# Altium PCB VeggieIrrigation.PcbDoc
Units mm, origin at the board's own origin, x right, y up, seen from the top; angles counter-clockwise.
Board outline 80.47 x 85.32 mm, 2 copper layers (Top Layer, Bottom Layer); 29 components, 21 nets, 89 pads, 0 vias.
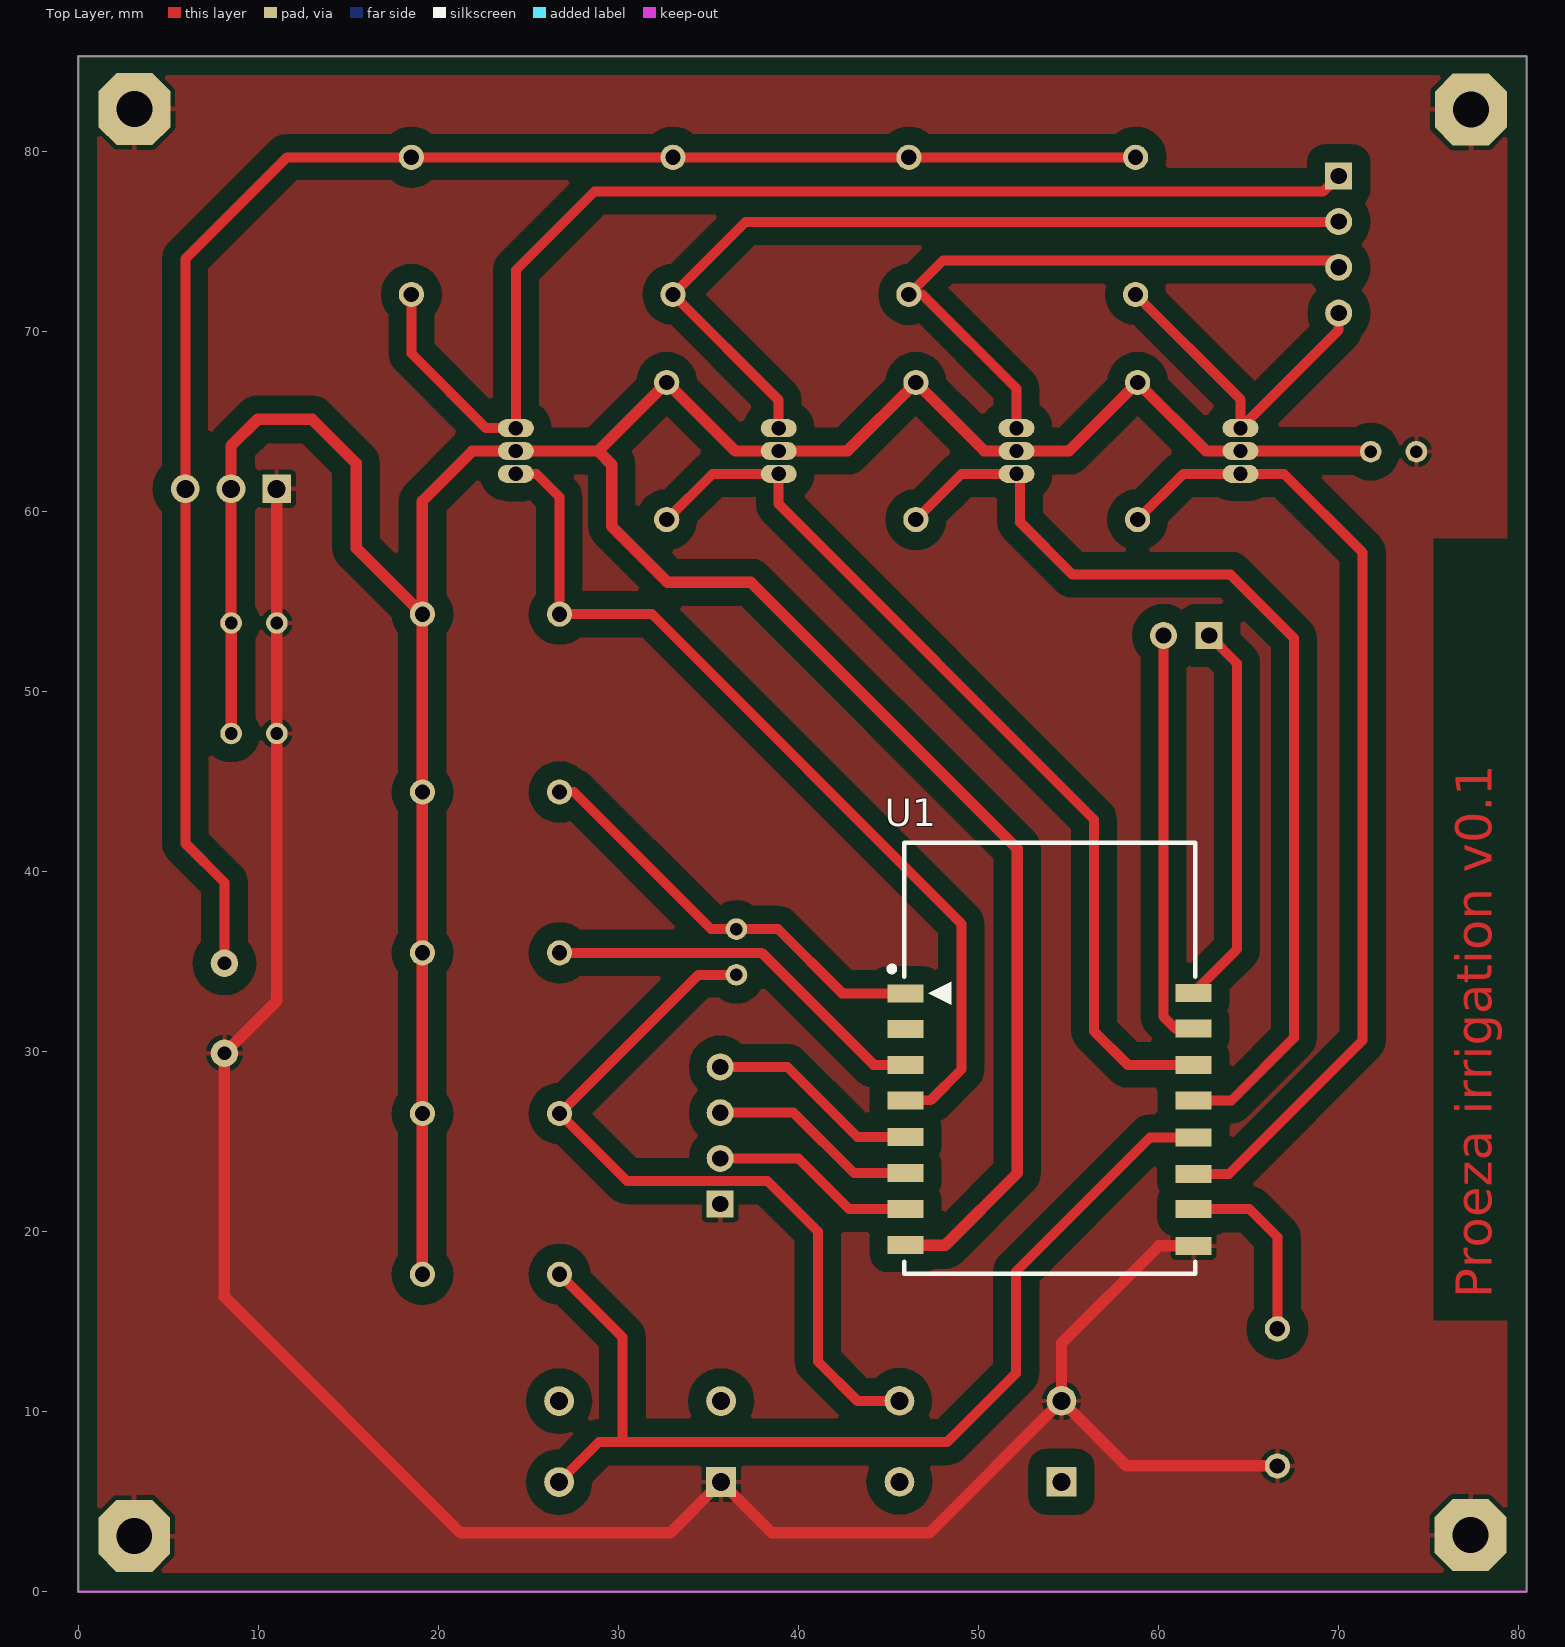
[diagram p0: Top Layer view]
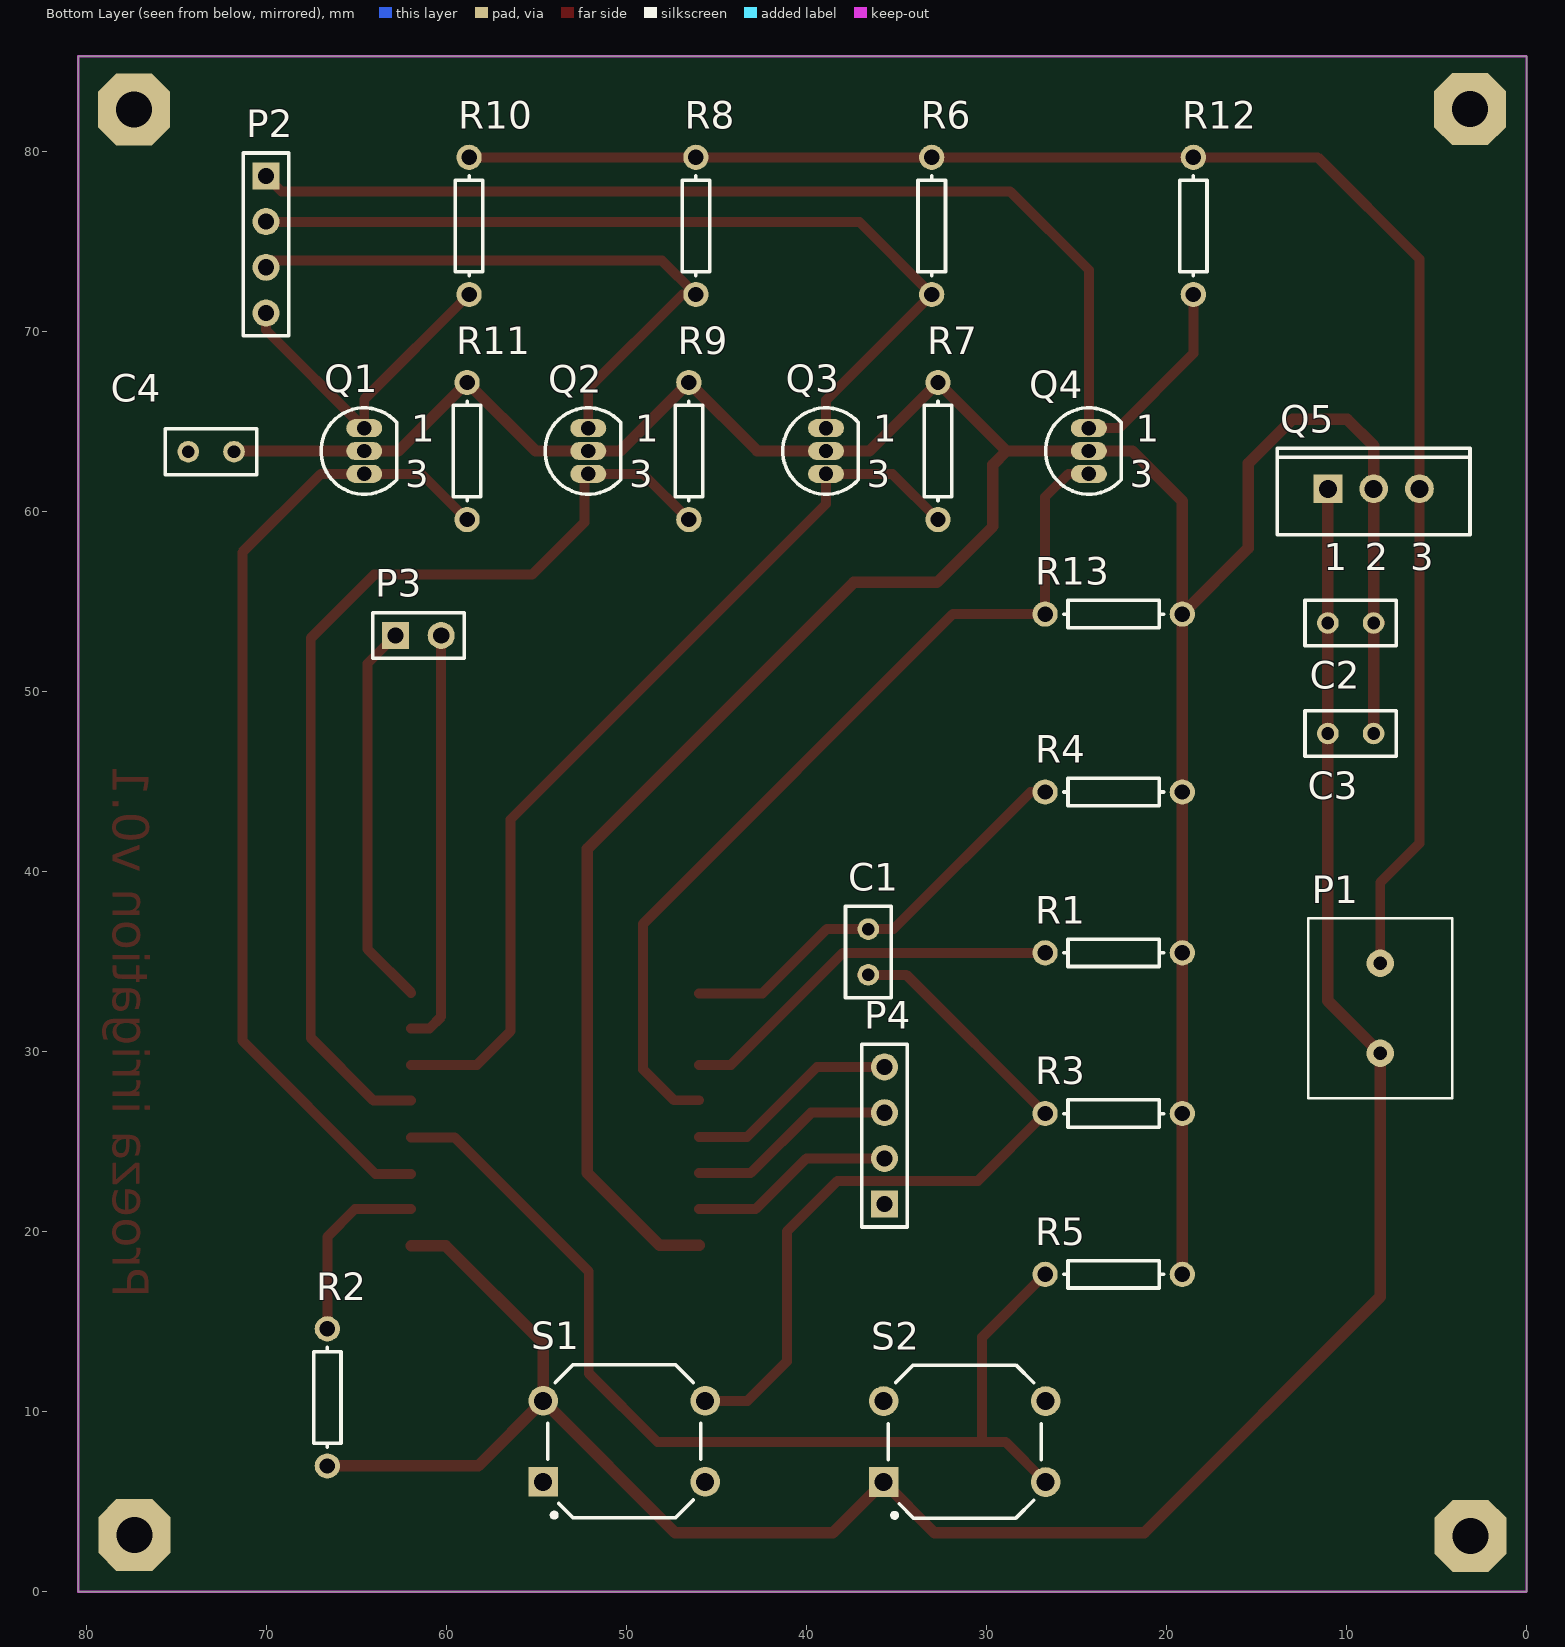
[diagram p1: Bottom Layer view, seen from below]

## Layer stack, top to bottom
Top Solder: solder mask 0.0102, Solder Resist, Dk 3.5
Top Layer: signal copper 0.0356
Dielectric 1: dielectric 0.32, FR-4, Dk 4.8
Bottom Layer: signal copper 0.0356
Bottom Solder: solder mask 0.0102, Solder Resist, Dk 3.5

## Board outline
0,0 80.469,0 80.469,85.319 0,85.319

## Design rules (kind name [scope] priority, off if disabled: settings)
Clearance "Polygon Pour Clearence" [InPolygon] p1: gap=1 ignorepadtopadclearanceinfootprint=FALSE
PolygonConnect [All] p1: connectstyle=Relief reliefconductorwidth=0.254 reliefentries=4 polygonreliefangle="90 Angle" airgapwidth=0.254
RoutingLayers [All] p1: top layer_v5=TRUE bottom layer_v5=FALSE
RoutingVias [All] p1: holewidth=0.711 width=1.27 viastyle="Through Hole" minholewidth=0.711 minwidth=1.27 maxholewidth=0.711 maxwidth=1.27
SolderMaskExpansion [All] p1: expansion=0.102
Width "Schematic Width Constraint_2" [InNet('GND')] p1: maxlimit=0.762 minlimit=0.508 preferedwidth=0.635
Width "Schematic Width Constraint_1" [InNet('+3.3VDC')] p2: maxlimit=0.762 minlimit=0.381 preferedwidth=0.635
Width [All] p3: maxlimit=0.754 minlimit=0.254 preferedwidth=0.554
29 further rules are at their usual default settings.

## Components (designator, comment, footprint, x,y, rotation, side; value= is the part's Value field where it differs from the comment)
C1 "10uf" RAD-0.1 36.57,35.552 r270 bottom
C2 "100nf" RAD-0.1 9.77,53.828 r0 bottom value=100nF
C3 "100nf" RAD-0.1 9.77,47.688 r180 bottom value=100nF
C4 "Cap" RAD-0.1 73.081,63.343 r0 bottom value=100nF
P1 "VAC" ScrewTerminal-X2 4.127,27.421 r90 bottom
P2 "Header 4" HDR1X4 70.034,78.667 r270 bottom
P3 "" HDR1X2 62.839,53.133 r180 bottom
P4 "" HDR1X4 35.672,21.54 r90 bottom
Q1 "2N7000" SOT54 64.576,63.382 r180 bottom
Q2 "2N7000" SOT54 52.13,63.382 r180 bottom
Q3 "2N7000" SOT54 38.922,63.382 r180 bottom
Q4 "2N7000" SOT54 24.317,63.382 r180 bottom
Q5 "Regulador 3.3V" TO-220-AB 8.49,61.286 r180 bottom
R1 "10K" AXIAL-0.3 22.936,35.504 r0 bottom
R2 "10K" AXIAL-0.3 66.628,10.803 r270 bottom
R3 "10K" AXIAL-0.3 22.936,26.572 r180 bottom
R4 "10K" AXIAL-0.3 22.936,44.435 r180 bottom
R5 "10K" AXIAL-0.3 22.936,17.64 r180 bottom
R6 "10K" AXIAL-0.3 33.046,75.892 r90 bottom
R7 "10K" AXIAL-0.3 32.699,63.382 r90 bottom
R8 "10K" AXIAL-0.3 46.152,75.892 r90 bottom
R9 "10K" AXIAL-0.3 46.542,63.382 r90 bottom
R10 "10K" AXIAL-0.3 58.749,75.892 r90 bottom
R11 "10K" AXIAL-0.3 58.861,63.382 r90 bottom
R12 "10K" AXIAL-0.3 18.513,75.892 r90 bottom
R13 "10K" AXIAL-0.3 22.936,54.319 r180 bottom
S1 "RST" IT-2175 50.131,8.362 r180 bottom
S2 "Flash" IT-2175 31.218,8.349 r180 bottom
U1 "ESP-12" ESP_12 45.968,33.251 r0 top

## Footprints (in the part's own frame and the unit in brackets; to place one, negate y for a bottom-side part, rotate by r counter-clockwise, add the part's x,y. Pads: shape width x height; smd on the part's side, far side on the other; paste and mask are expansions set on the pad)
AXIAL-0.3 [mm] "Axial Device, Thru-Hole; 2 Leads; 0.3 in Pin Spacing"
  round 1.4 hole 0.85: 1(-3.81,0) 2(3.81,0)
  silkscreen extent -2.77,-0.76 2.77,0.76
ESP_12 [mm]
  rect 2x1 smd: 1(0,0) 2(0,-1.97) 3(0,-3.97) 4(0,-5.94) 5(0,-7.98) 6(0,-9.99) 7(0,-11.98) 8(0,-13.99) 9(16,-14.03) 10(16,-11.99) 11(16,-10.03) 12(16,-8.01) 13(16,-5.95) 14(16,-3.97) 15(16,-1.95) 16(16,0.03)
  silkscreen extent -0.91,-15.57 16.08,8.37
HDR1X2 [mm] "Connector; Header; 2 Position"
  rect 1.5x1.5 hole 0.9: 1(0,0)
  round 1.5 hole 0.9: 2(2.54,0)
  silkscreen extent -1.27,-1.27 3.81,1.27
HDR1X4 [mm] "Connector; Header; 4 Position"
  rect 1.5x1.5 hole 0.9: 1(0,0)
  round 1.5 hole 0.9: 2(2.54,0) 3(5.08,0) 4(7.62,0)
  silkscreen extent -1.27,-1.27 8.89,1.27
IT-2175 [mm] "Switch, Push Button, Thru-Hole; 4 Leads; Body 8.5 x 8.5 mm (LxW typ); Row Spacing 9.0 mm; Pitch 4.5 mm"
  rect 1.65x1.65 hole 1: 1(-4.5,-2.25)
  round 1.65 hole 1: 2(4.5,-2.25) 3(-4.5,2.25) 4(4.5,2.25)
  silkscreen extent -4.25,-4.25 4.25,4.25
RAD-0.1 [mm]
  round 1.2 hole 0.7: 1(-1.27,0) 2(1.27,0)
  silkscreen extent -2.54,-1.27 2.54,1.27
ScrewTerminal-X2 [mil]
  round 60 hole 30: 1(98.43,157.48) 2(295.28,157.48)
  silkscreen extent 0,0 394,315
SOT54 [mm] "TO, Flat Index; 3 In-Line, Axial Leads; Body Dia. 4.6mm; Leads 0.48 x 0.45 mm (max)"
  oval 2x1 hole 0.8: 1(0,1.27) 2(0,0) 3(0,-1.27)
  silkscreen extent -2.4,-2.4 1.8,2.4
TO-220-AB [mm] "TO, Thru-Hole, Vertical, Heatsink Mounted; 3 In-Line Leads; Pitch 2.54 mm"
  rect 1.6x1.6 hole 1: 1(-2.54,0)
  round 1.6 hole 1: 2(0,0) 3(2.54,0)
  silkscreen extent -5.35,-2.55 5.35,2.25

## Part data
C1: library part "Cap Pol1", "Polarized Capacitor (Radial)", LatestRevisionDate=17-Jul-2002, LatestRevisionNote="Re-released for DXP Platform.", PackageDescription="Polarized Capacitor (Radial); 2 Leads", PackageReference=RB7.6-15, Published=8-Jun-2000, Publisher="Altium Limited"
C2 C3: library part Cap, "Capacitor", LatestRevisionDate=17-Jul-2002, LatestRevisionNote="Re-released for DXP Platform.", PackageDescription="Radial Cap, Thru-Hole; 2 Leads; 0.3 in Pin Spacing", PackageReference=RAD-0.3, Published=8-Jun-2000, Publisher="Altium Limited"
C4: "Capacitor", LatestRevisionDate=17-Jul-2002, LatestRevisionNote="Re-released for DXP Platform.", PackageDescription="Radial Cap, Thru-Hole; 2 Leads; 0.3 in Pin Spacing", PackageReference=RAD-0.3, Published=8-Jun-2000, Publisher="Altium Limited"
P1: library part ScrewTerminal
P2: "Header, 4-Pin", LatestRevisionDate=17-Jul-2002, LatestRevisionNote="Re-released for DXP Platform.", Publisher="Altium Limited"
P3: library part "Header 2", "Header, 2-Pin", LatestRevisionDate=17-Jul-2002, LatestRevisionNote="Re-released for DXP Platform.", Publisher="Altium Limited"
P4: library part "Header 4", "Header, 4-Pin", LatestRevisionDate=17-Jul-2002, LatestRevisionNote="Re-released for DXP Platform.", Publisher="Altium Limited"
Q1 Q2 Q3 Q4: "N-channel Enhancement Mode Field-effect Transistor", Code_JEDEC=TO-92, Code_JEITA=SC-43, ComponentLink1Description="Manufacturer Link", ComponentLink1URL=http://www.semiconductors.philips.com/, ComponentLink2Description=Datasheet, ComponentLink2URL=http://www.semiconductors.philips.com/acrobat/datasheets/2N7000-03.pdf, DatasheetVersion=19-May-2000, LatestRevisionDate=12-Dec-2006, LatestRevisionNote="Footprint pad sequence fixed.", PackageDescription="Plastic Single-Ended Leaded (through hole) package; 3 Leads (TO-92)", PackageReference=SOT54, PackageVersion=Feb-1997, Published=17-Sep-2003, Publisher="Altium Limited"
Q5: library part AMS1117
R1 R2 R3 R4 R5 R6 R7 R8 R9 R10 R11 R12 R13: library part Res1, "Resistor", LatestRevisionDate=17-Jul-2002, LatestRevisionNote="Re-released for DXP Platform.", PackageDescription="Axial Device, Thru-Hole; 2 Leads; 0.3 in Pin Spacing", PackageReference=AXIAL-0.3, Published=8-Jun-2000, Publisher="Altium Limited"
S1 S2: library part IT-2175, "Tactile Switch, DPST; Thru-Hole; Vertical; Rating DC 12V, 50mA (max)", PackageDocument=Rev.0, ComponentLink1Description="Manufacturer Link", ComponentLink1URL=http://www.ilswitch.com/, ComponentLink2Description="Device Overview", ComponentLink2URL=http://www.ilswitch.com/list.php?ac_id=010112&ai_id=91, DatasheetDocument=Rev.0, PackageReference=IT-2175, Published=6-Jun-2005, Publisher="Altium Limited"

## Free pads (board coordinates)
  oct 4x4 hole 2: 1(3.136,82.374) 2(77.371,82.358) 3(77.35,3.162) 4(3.115,3.113)

## Nets (pads, with @x,y where several pads share a name; then routed paths per layer and width w, separated by ;. In a path a pad name is that pad's centre, name@x,y a point inside that pad or via, vN(x,y) a via of type N, cw(c..) or ccw(c..) an arc to the next point about the centre after c; other vN are vias at no path point)
+3.3VDC: C2.1 C3.2 C4.1 Q1.2 Q2.2 Q3.2 Q4.2 Q5.2 R1.1 R3.2 R4.2 R5.2 R7.2 R9.2 R11.2 R13.2 U1.8 | length 201.1
  Top Layer w0.635: C2.1@8.193,53.838 C2.1@8.203,53.828 ; C2.1@8.49,53.838 Q5.2 8.49,63.672 9.971,65.153 12.995,65.153 15.455,62.693 15.455,57.99 R13.2 ; C3.2 C2.1 ; R5.2 R3.2 R1.1 R4.2 R13.2 ; U1.8@45.958,19.261 U1.8 48.172,19.261 52.181,23.27 52.181,41.277 37.379,56.079 32.759,56.079 29.648,59.19 29.648,62.623 28.889,63.382 ; C4.1 71.773,63.382 Q1.2 62.671,63.382 R11.2 55.051,63.382 Q2.2 50.352,63.382 R9.2 42.732,63.382 Q3.2 36.509,63.382 R7.2 28.889,63.382 ; R13.2 19.126,60.603 21.904,63.382 Q4.2 28.889,63.382
+5VDC: P1.2 Q5.3 R6.2 R8.2 R10.2 R12.2 | length 95.2
  Top Layer w0.554: P1.2 8.127,39.41 5.95,41.588 Q5.3 5.95,74.05 11.601,79.702 R12.2 R6.2 R8.2 R10.2
GND: C2.2 C3.1 C4.2 P1.1 P4.1 pad.1 pad.2 pad.3 pad.4 Q5.1 R2.2 S1.3 S2.1 U1.9 | length 129.7
  Top Layer w0.635: Q5.1 11.04,61.276 C2.2 C3.1 11.04,32.834 P1.1 8.127,16.395 21.248,3.274 32.894,3.274 S2.1 38.542,3.274 47.293,3.274 S1.3 ; U1.9 60.046,19.221 54.631,13.806 S1.3 ; R2.2@66.628,7.009 58.235,7.009 S1.3
NetC1_1: C1.1 R4.1 U1.1 | length 23.9
  Top Layer w0.554: R4.1 27.549,44.435 35.163,36.822 C1.1 38.877,36.822 42.448,33.251 U1.1
NetC1_2: C1.2 R3.1 S1.4 | length 43.1
  Top Layer w0.554: C1.2@36.917,34.282 C1.2 34.463,34.282 26.753,26.572 R3.1 30.486,22.832 38.294,22.832 41.099,20.027 41.099,12.802 43.288,10.612 S1.4
NetP2_1: P2.1 Q4.1 R12.1 | length 67.5
  Top Layer w0.554: R12.1 18.513,68.796 22.657,64.652 Q4.1 24.317,73.436 28.687,77.806 69.173,77.806 P2.1
NetP2_2: P2.2 Q3.1 R6.1 | length 48.5
  Top Layer w0.554: Q3.1 38.922,66.206 R6.1 37.068,76.103 70.01,76.103 P2.2
NetP2_3: P2.3 Q2.1 R8.1 | length 35.2
  Top Layer w0.554: Q2.1 52.13,66.848 46.896,72.082 R8.1 48.044,73.974 69.646,73.974 P2.3
NetP2_4: P2.4 Q1.1 R10.1 | length 18.5
  Top Layer w0.554: R10.1 64.576,66.255 Q1.1 70.034,70.109 P2.4
NetP3_1: P3.1 U1.16 | length 21.5
  Top Layer w0.554: U1.16 64.39,35.702 64.39,51.583 P3.1
NetP3_2: P3.2 U1.15 | length 23.1
  Top Layer w0.554: P3.2 60.299,31.955 60.953,31.301 U1.15
NetP4_2: P4.2 U1.7 | length 11.5
  Top Layer w0.554: P4.2 40.016,24.08 42.825,21.271 U1.7
NetP4_3: P4.3 U1.6 | length 11.7
  Top Layer w0.554: P4.3 39.745,26.62 43.104,23.261 U1.6
NetP4_4: P4.4 U1.5 | length 11.9
  Top Layer w0.554: P4.4 39.414,29.16 43.303,25.271 U1.5
NetQ1_3: Q1.3 R11.1 U1.11 | length 54.9
  Top Layer w0.554: R11.1 61.401,62.112 Q1.3@64.551,62.112 ; U1.11 63.945,23.221 71.349,30.625 71.349,57.754 66.991,62.112 Q1.3
NetQ2_3: Q2.3 R9.1 U1.13 | length 56.6
  Top Layer w0.554: R9.1 49.082,62.112 Q2.3 ; Q2.3@52.336,62.317 52.336,59.422 55.248,56.509 64.023,56.509 67.548,52.984 67.548,30.779 64.07,27.301 U1.13
NetQ3_3: Q3.3 R7.1 U1.14 | length 51.8
  Top Layer w0.554: R7.1 35.239,62.112 Q3.3 38.922,60.431 56.444,42.909 56.444,31.15 58.313,29.281 U1.14
NetQ4_3: Q4.3 R13.1 U1.4 | length 50.8
  Top Layer w0.554: Q4.3 25.46,62.112 26.746,60.826 R13.1 31.874,54.319 49.079,37.114 49.079,29.023 47.367,27.311 U1.4
NetR1_2: R1.2 U1.3 | length 21.8
  Top Layer w0.554: R1.2 37.976,35.504 44.198,29.281 U1.3
NetR2_1: R2.1 U1.10 | length 10.4
  Top Layer w0.554: U1.10 65.084,21.261 66.628,19.717 R2.1@66.628,14.629
NetR5_1: R5.1 S2.2 U1.12 | length 57.3
  Top Layer w0.554: S2.2 28.938,8.319 30.241,8.319 ; R5.1 30.241,14.145 30.241,8.319 ; U1.12 59.547,25.241 52.103,17.797 52.103,12.141 48.281,8.319 30.241,8.319
pads on no net: S1.1 S1.2 S2.3 S2.4 U1.2

## Polygon pours and split planes (outlines as drawn)
GND on Top Layer "GND" (solid, pour order 8): 0,85.319 80.469,85.319 80.469,0 0,0

## Keep-outs
Keep-Out Layer:
  the board outline again, w0.127

## Other copper
Top Layer:
  text "Proeza irrigation v0.1" at 78.54,16.306 h2 r90

## Text inside footprints (layer, text, board x,y; h text height)
Q1: Bottom Overlay "1" at 61.96,63.902 h1.5; Bottom Overlay "3" at 62.301,61.362 h1.5
Q2: Bottom Overlay "1" at 49.514,63.902 h1.5; Bottom Overlay "3" at 49.855,61.362 h1.5
Q3: Bottom Overlay "1" at 36.306,63.902 h1.5; Bottom Overlay "3" at 36.647,61.362 h1.5
Q4: Bottom Overlay "1" at 21.701,63.902 h1.5; Bottom Overlay "3" at 22.042,61.362 h1.5
Q5: Bottom Overlay "1" at 11.28,56.761 h1.5; Bottom Overlay "2" at 8.99,56.761 h1.5; Bottom Overlay "3" at 6.45,56.761 h1.5
U1: Mechanical 13 "ANTENNA AREA" at 46.095,41.125 h0.25; Mechanical 13 "CUTOUT POLYGON" at 46.095,40.617 h0.25